# Altium PCB PCB1.PcbDoc
Units mm, origin at the board's own origin, x right, y up, seen from the top; angles counter-clockwise.
Board outline 152.4 x 101.6 mm, 4 copper layers (Top Layer, GND, VCC, Bottom Layer), stack 1.656 mm thick; 37 components, 51 nets, 234 pads, 63 vias.
Unrouted connection lines stored in the file: 10.
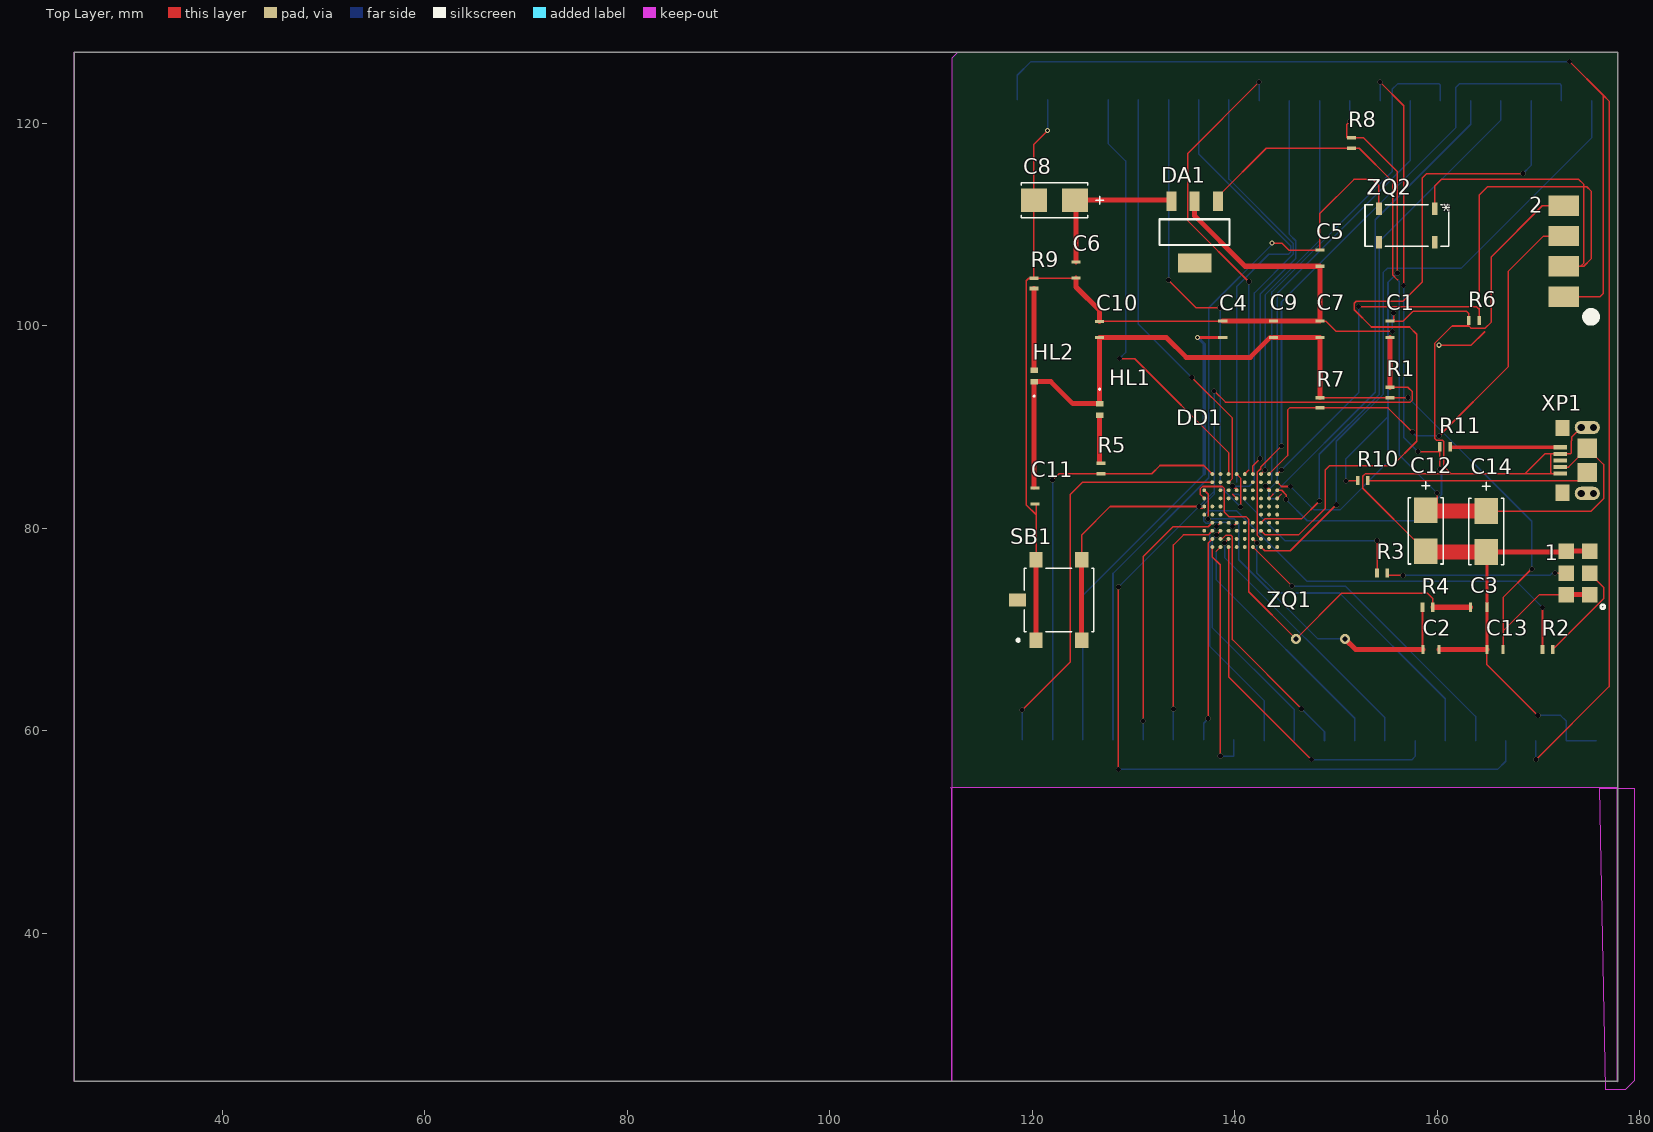
[diagram p0: Top Layer view]
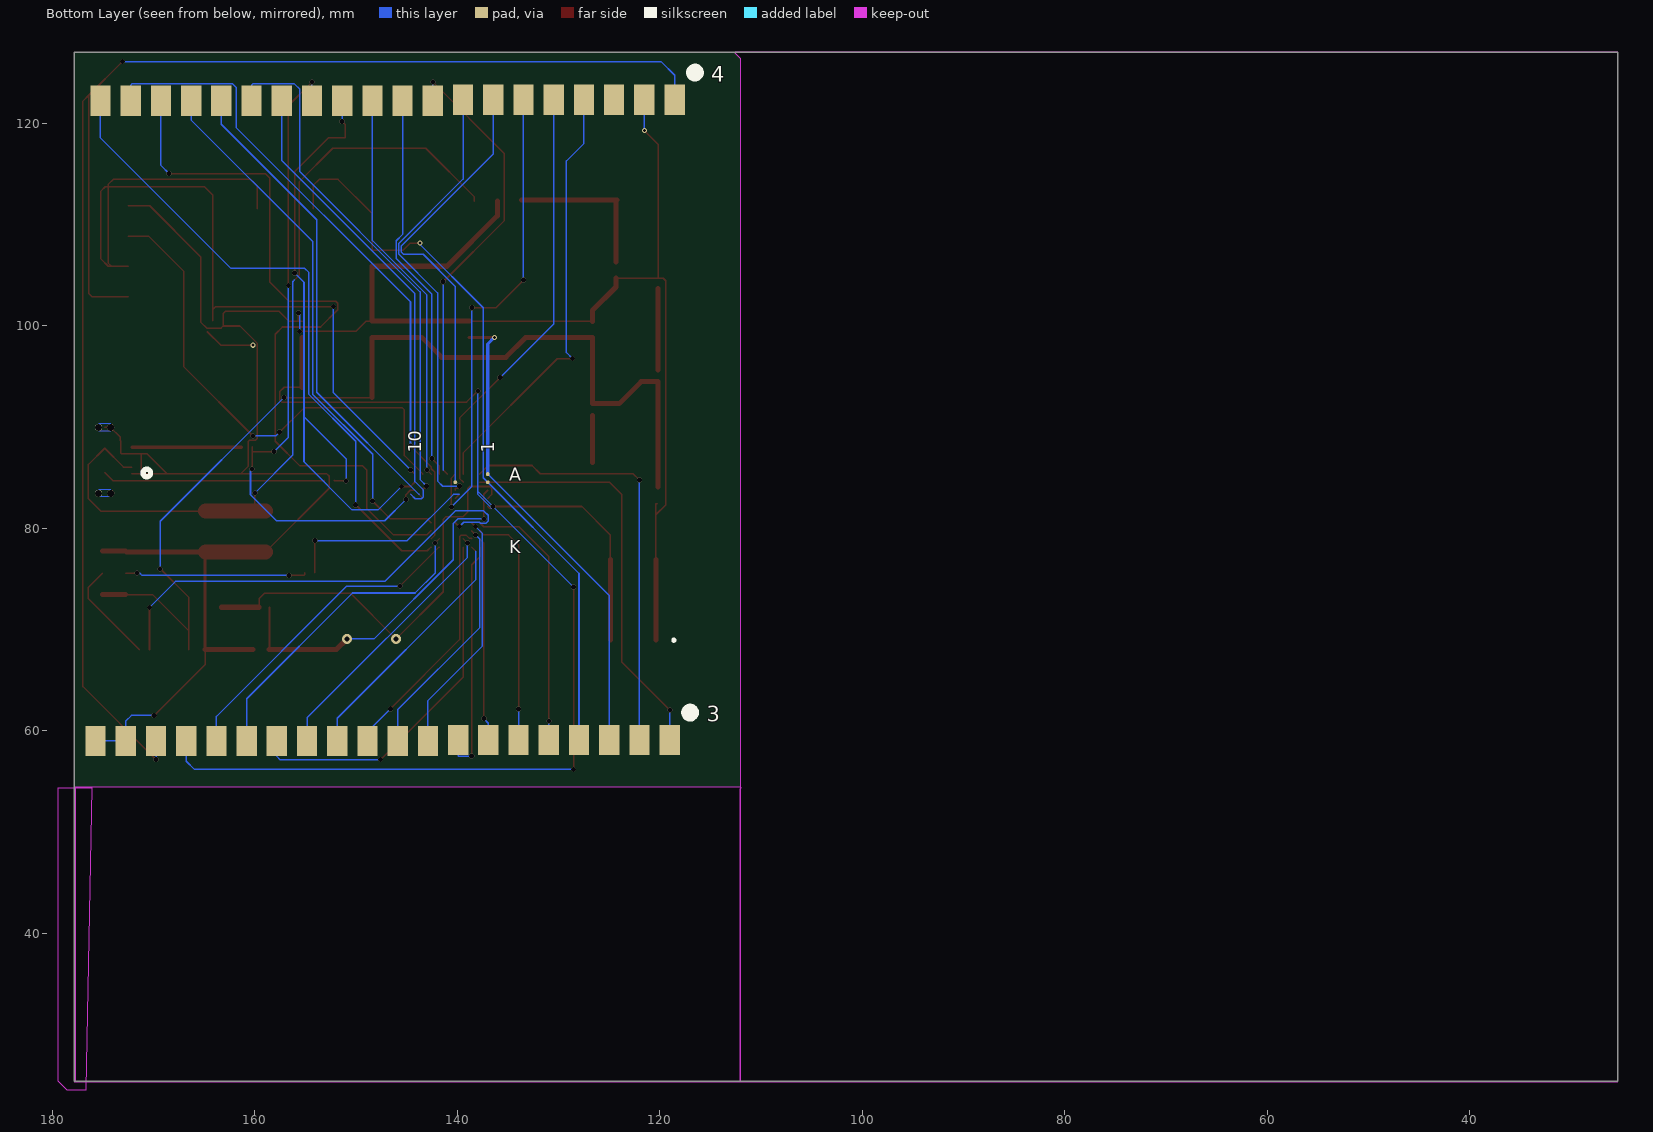
[diagram p1: Bottom Layer view, seen from below]
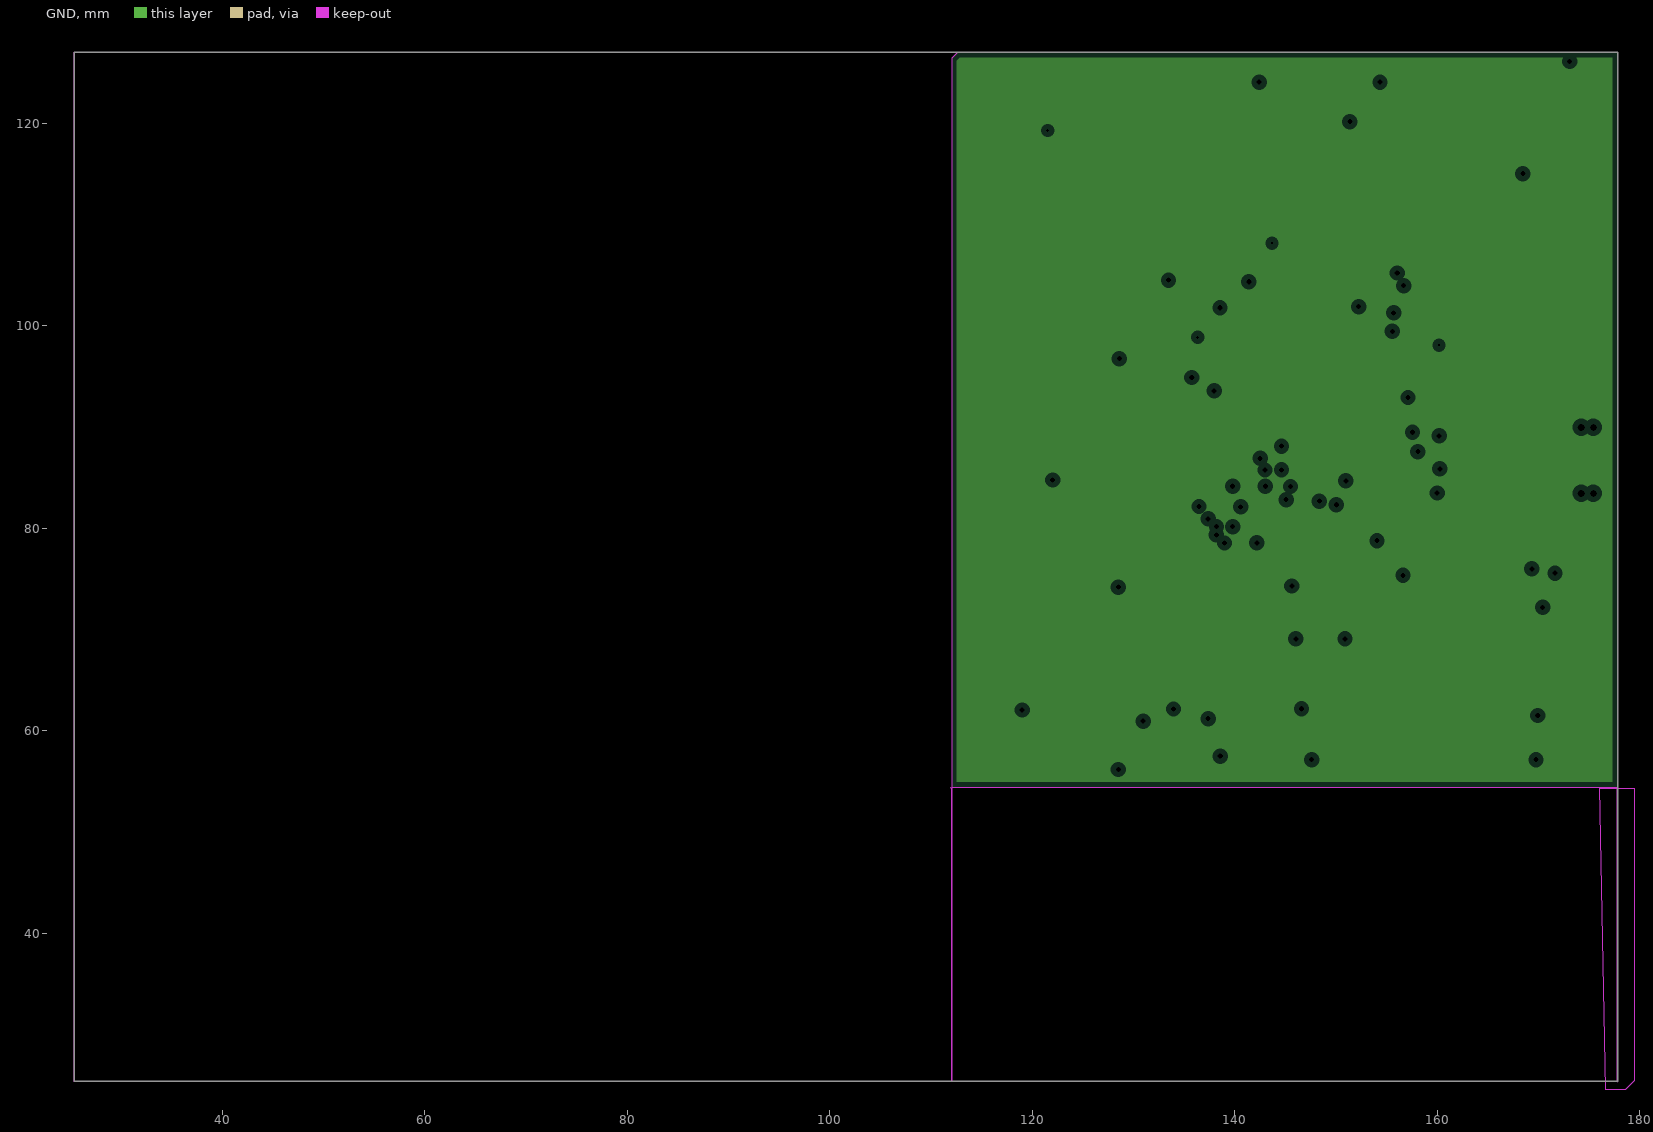
[diagram p2: GND, clearances drawn from the general rule]
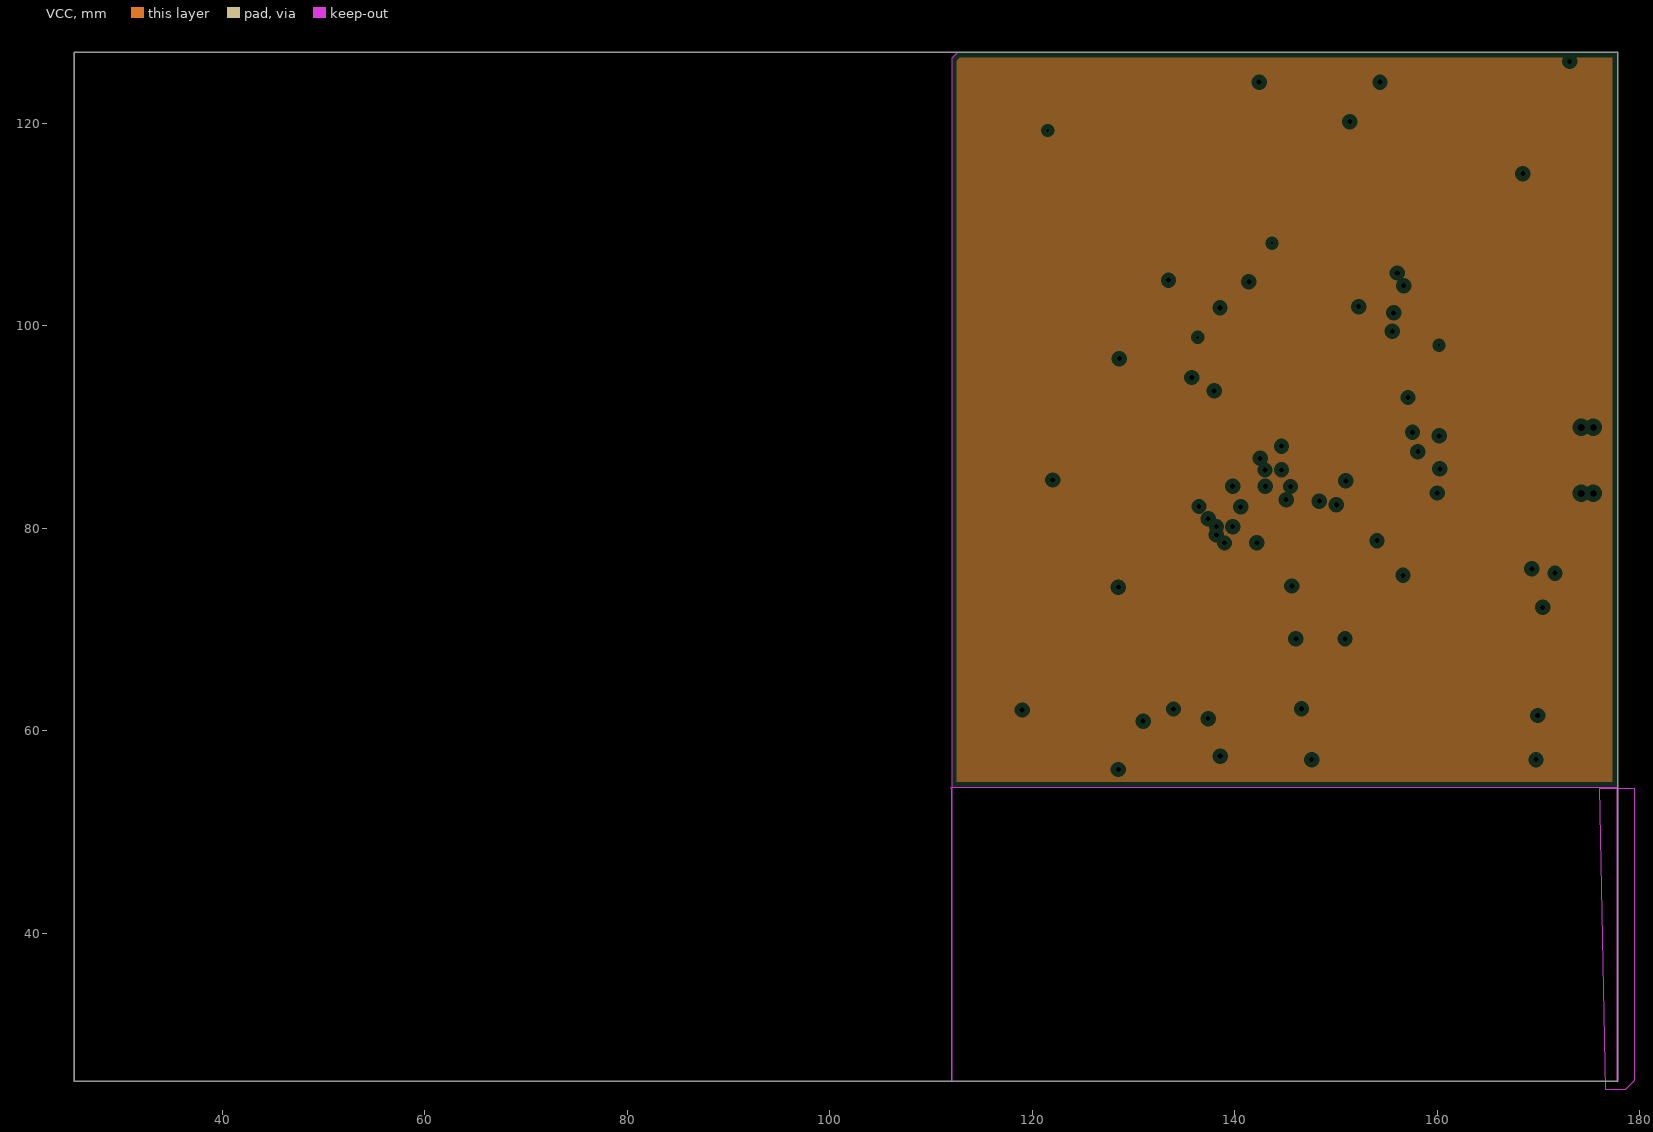
[diagram p3: VCC, clearances drawn from the general rule]

## Layer stack, top to bottom
Top Layer: signal copper 0.035
Dielectric 2: core 0.508, Core-036, Dk 4.2
GND: plane copper 0.035
Dielectric 1: dielectric 0.5, FR-4, Dk 4.2
VCC: plane copper 0.035
Dielectric 3: core 0.508, Core-036, Dk 4.2
Bottom Layer: signal copper 0.035

## Board outline
25.4,25.4 177.8,25.4 177.8,127 25.4,127
cut-out: 176.025,54.425 176.1,54.35 179.425,54.35 179.425,25.45 178.55,24.575 176.625,24.575
cut-out: 112.075,54.45 177.725,54.45 177.725,25.425 177.8,25.35 112.025,25.35 112.025,54.275 111.925,54.375
cut-out: 112.575,126.95 112.025,126.4 112.025,25.35 25.425,25.35 25.4,25.325 25.375,25.35 25.375,127.025 112.525,127.025 112.55,127

## Design rules (kind name [scope] priority, off if disabled: settings)
Clearance [All] p1: gap=0.1 ignorepadtopadclearanceinfootprint=TRUE
HoleSize [All] p1: absolutevalues=TRUE maxlimit=2 minlimit=0.5 maxpercent=80.000 minpercent=20.000
PlaneClearance [All] p1: clearance=0.508
PlaneConnect [All] p1: planeconnectstyle=Relief reliefexpansion=0.508 reliefentries=4 reliefconductorwidth=0.254 reliefairgap=0.254
PolygonConnect [All] p1: connectstyle=Relief reliefconductorwidth=0.254 reliefentries=4 polygonreliefangle="90 Angle" airgapwidth=0.254
RoomDefinition Sheet1 [InComponentClass('Sheet1')] p1: confinementstyle=ConfineIn formatcopy=TRUE lockcomponents=FALSE outline 178.85,27.025 392.81,27.025 392.81,88.003 178.85,88.003
RoutingVias [All] p1: holewidth=0.5 width=0.5 viastyle="Through Hole" minholewidth=0.3 minwidth=0.3 maxholewidth=1 maxwidth=1
SMDNeckDown [All] p1: percent=50.000
SolderMaskExpansion [All] p1: expansion=0.102 istentingtop=FALSE
Width [All] p1: maxlimit=2 minlimit=0.1 preferedwidth=0.15
27 further rules are at their usual default settings.

## Components (designator, comment, footprint, x,y, rotation, side; value= is the part's Value field where it differs from the comment)
1 "pin_boot" PIN_BOOT 175.025,73.45 r180 top
2 "pins_jtag" PIN_JTAG 172.466,102.874 r90 top
3 "pin_left" pin_left 118.998,59.1 r0 bottom
4 "pin_right" pin_right 118.514,122.299 r0 bottom
C1 "='0603'+' '+'63 В'+' '+'1 мкФ'+' '+'10%'+' '+'*'+'" C_0603 155.3,100.45 r270 top value="1 мкФ"
C2 "='0603'+' '+'63 В'+' '+'20 пФ'+' '+'10%'+' '+'*'+'" C_0603 160.175,68.025 r180 top value="20 пФ"
C3 "='0603'+' '+'63 В'+' '+'20 пФ'+' '+'10%'+' '+'*'+'" C_0603 164.875,72.2 r180 top value="20 пФ"
C4 "='0603'+' '+'63 В'+' '+'20 пФ'+' '+'10%'+' '+'*'+'" C_0603 138.8,98.85 r90 top value="20 пФ"
C5 "='0603'+' '+'63 В'+' '+'20 пФ'+' '+'10%'+' '+'*'+'" C_0603 148.4,107.475 r270 top value="20 пФ"
C6 "='0603'+' '+'63 В'+' '+'100 нФ'+' '+'10%'+' '+'*'+'" C_0603 124.32,106.295 r270 top value="100 нФ"
C7 "='0603'+' '+'63 В'+' '+'100 нФ'+' '+'10%'+' '+'*'+'" C_0603 148.4,100.45 r270 top value="100 нФ"
C8 "='CASE-C_6032'+' '+'63 В'+' '+'330 мкФ'+' '+'10%'+' '+'*'+'" CAPMP6.3X3.2_2.8N_KEM 122.175,112.4 r180 top value="330 мкФ"
C9 "='0603'+' '+'63 В'+' '+'100 нФ'+' '+'10%'+' '+'*'+'" C_0603 143.8,100.45 r270 top value="100 нФ"
C10 "='0603'+' '+'63 В'+' '+'100 нФ'+' '+'10%'+' '+'*'+'" C_0603 126.65,100.425 r270 top value="100 нФ"
C11 "='0603'+' '+'63 В'+' '+'100 нФ'+' '+'10%'+' '+'*'+'" C_0603 120.25,82.4 r90 top value="100 нФ"
C12 "='CASE-C_6032'+' '+'63 В'+' '+'100 мкФ'+' '+'10%'+' '+'*'+'" CAPMP6.3X3.2_2.8N_KEM 158.85,79.75 r270 top value="100 мкФ"
C13 "='0603'+' '+'63 В'+' '+'100 нФ'+' '+'10%'+' '+'*'+'" C_0603 164.875,68.025 r0 top value="100 нФ"
C14 "='CASE-C_6032'+' '+'63 В'+' '+'100 мкФ'+' '+'10%'+' '+'*'+'" CAPMP6.3X3.2_2.8N_KEM 164.825,79.675 r270 top value="100 мкФ"
DA1 "TC2117-3.3VDBTR Microchip" TC2117 138.325,112.3 r270 top
DD1 "STM32F103VBH7 STMicroelectronics" LFBGA100 140.575,81.75 r0 top
HL1 "XL-0603QYGC KENTO" LED_DIALIGHT_598_DIA-M 126.65,91.725 r270 top
HL2 "XL-0603QYGC KENTO" LED_DIALIGHT_598_DIA-M 120.175,95.05 r90 top
R1 "R-0603 0.1 Вт 10 кОм 10% Yageo" R_0603 155.3,93.925 r270 top value="10 кОм"
R2 "R-0603 0.1 Вт 100 кОм 10% Yageo" R_0603 171.391,68.025 r180 top value="100 кОм"
R3 "R-0603 0.1 Вт 100 кОм 10% Yageo" R_0603 154.034,75.6 r0 top value="100 кОм"
R4 "R-0603 0.1 Вт 1 МОм 10% Yageo" R_0603 159.541,72.2 r180 top value="1 МОм"
R5 "R-0603 0.1 Вт 510 Ом 10% Yageo" R_0603 126.775,85.384 r90 top value="510 Ом"
R6 "R-0603 0.1 Вт 10 кОм 10% Yageo" R_0603 163.109,100.5 r0 top value="10 кОм"
R7 "R-0603 0.1 Вт 10 кОм 10% Yageo" R_0603 148.4,91.884 r90 top value="10 кОм"
R8 "R-0603 0.1 Вт 1.5 кОм 10% Yageo" R_0603 151.525,117.525 r90 top value="1.5 кОм"
R9 "R-0603 0.1 Вт 510 Ом 10% Yageo" R_0603 120.175,104.691 r270 top value="510 Ом"
R10 "R-0603 0.1 Вт 20 Ом 10% Yageo" R_0603 152.125,84.725 r0 top value="20 Ом"
R11 "R-0603 0.1 Вт 20 Ом 10% Yageo" R_0603 160.234,88.05 r0 top value="20 Ом"
SB1 "B3S-1100 Omron" SW_B3S-1100_OMR 122.625,72.925 r90 top
XP1 "2174507-2 TE Connectivity" "CONN5_2013499-1_TEC - duplicate" 174.448,86.7 r90 top
ZQ1 "OSC_8M LCSC" HC-49S 150.875,69.075 r180 top
ZQ2 "OSC_32.7K LCSC" SOJ_MC-306_EPS 156.975,109.9 r270 top

## Footprints (in the part's own frame and the unit in brackets; to place one, negate y for a bottom-side part, rotate by r counter-clockwise, add the part's x,y. Pads: shape width x height; smd on the part's side, far side on the other; paste and mask are expansions set on the pad)
C_0603 [mm]
  rect 0.3x0.9 smd: 1(0,0) 2(1.6,0)
  body extent -0.3,-0.6 1.9,0.6, height 0.9
CAPMP6.3X3.2_2.8N_KEM [mm]
  rect 2.55x2.3 smd paste+0 mask+0: 1(-2.025,0) 2(2.025,0)
  silkscreen extent -4.85,-1.73 3.28,1.73, body extent -3.15,-1.72 3.15,1.78, height 2.81
"CONN5_2013499-1_TEC - duplicate" [mil]
  rect 16x53 smd paste+0 mask+0: 1(-51.18,91.54) 2(-25.59,91.54) 3(0,91.54) 4(25.59,91.54) 5(51.18,91.54)
  rect 75x75 smd: 6(-47.24,-13.86) 7(47.24,-13.86)
  rect 63x55 smd: 8(-125.98,82.6) 9(125.98,82.6)
  oval 52x98 smd: 10(-128.15,-13.86) 11(128.15,-13.86)
  round 28 hole 28 unplated: 12(-128.15,9.64) 13(-128.15,-37.36) 14(128.15,9.64) 15(128.15,-37.36)
  Multi-Layer lines w1: -142.15,9.64 -142.15,-37.36 ; -114.15,9.64 -114.15,-37.36 ; 114.15,9.64 114.15,-13.86 114.15,-37.36 ; 142.15,9.64 142.15,-13.86 142.15,-37.36
  body extent -154,-98 154,98, height 107
HC-49S [mm]
  round 1 hole 0.5: 1(0,0) 2(4.85,0)
  body extent -3.05,-2.3 7.95,2.35, height 13.46
LED_DIALIGHT_598_DIA-M [mm]
  rect 0.544x0.761 smd paste+0 mask+0: 1(-0.578,0) 2(0.578,0)
  silkscreen extent -2.08,-0.08 -1.93,0.08, body extent -0.8,-0.39 0.8,0.39, height 0.71
LFBGA100 [mm]
  round 0.38 smd far side paste+0 mask+0: A1(-3.6,3.6) B1(-3.6,2.8) B5(-0.4,2.8)
  round 0.38 smd paste+0 mask+0: A2(-2.8,3.6) A3(-2,3.6) A4(-1.2,3.6) A5(-0.4,3.6) A6(0.4,3.6) A7(1.2,3.6) A8(2,3.6) A9(2.8,3.6) A10(3.6,3.6) B2(-2.8,2.8) B3(-2,2.8) B4(-1.2,2.8) B6(0.4,2.8) B7(1.2,2.8) B8(2,2.8) B9(2.8,2.8) B10(3.6,2.8) C1(-3.6,2) C3(-2,2) C4(-1.2,2) C5(-0.4,2) C6(0.4,2) C7(1.2,2) C8(2,2) C9(2.8,2) C10(3.6,2) D1(-3.6,1.2) D3(-2,1.2) D4(-1.2,1.2) D5(-0.4,1.2) D6(0.4,1.2) D7(1.2,1.2) D8(2,1.2) D9(2.8,1.2) D10(3.6,1.2) E1(-3.6,0.4) E2(-2.8,0.4) E3(-2,0.4) E8(2,0.4) E9(2.8,0.4) E10(3.6,0.4) F1(-3.6,-0.4) F2(-2.8,-0.4) F3(-2,-0.4) F8(2,-0.4) F9(2.8,-0.4) F10(3.6,-0.4) G2(-2.8,-1.2) G3(-2,-1.2) G4(-1.2,-1.2) G5(-0.4,-1.2) G6(0.4,-1.2) G7(1.2,-1.2) G8(2,-1.2) G9(2.8,-1.2) G10(3.6,-1.2) H1(-3.6,-2) H2(-2.8,-2) H3(-2,-2) H4(-1.2,-2) H5(-0.4,-2) H6(0.4,-2) H7(1.2,-2) H8(2,-2) H9(2.8,-2) H10(3.6,-2) J1(-3.6,-2.8) J2(-2.8,-2.8) J3(-2,-2.8) J4(-1.2,-2.8) J5(-0.4,-2.8) J6(0.4,-2.8) J7(1.2,-2.8) J8(2,-2.8) J9(2.8,-2.8) J10(3.6,-2.8) K2(-2.8,-3.6) K3(-2,-3.6) K4(-1.2,-3.6) K5(-0.4,-3.6) K6(0.4,-3.6) K7(1.2,-3.6) K8(2,-3.6) K9(2.8,-3.6) K10(3.6,-3.6)
  round 0.38 on Plane1 paste+0 mask+0: C2(-2.8,2) E4(-1.2,0.4) E5(-0.4,0.4) E6(0.4,0.4) E7(1.2,0.4) G1(-3.6,-1.2)
  round 0.38 on Plane2 paste+0 mask+0: D2(-2.8,1.2) F4(-1.2,-0.4) F5(-0.4,-0.4) F6(0.4,-0.4) F7(1.2,-0.4) K1(-3.6,-3.6)
  body extent -5.08,-5.08 5.08,5.08, height 1.7
PIN_BOOT [mil]
  rect 60x60 smd: 1(0,0) 2(90.55,0) 3(0,-82.68) 4(90.55,-82.68) 5(0,-169.29) 6(90.55,-169.29)
  silkscreen extent -59,39 -43,55
PIN_JTAG [mm]
  rect 2x3 smd: 1(0,0) 2(3,0) 3(5.983,0) 4(8.967,0)
  silkscreen extent -2.42,-3.12 -1.58,-2.28
pin_left [mm]
  rect 2x3 smd: 1(0,0) 2(3,0) 3(5.983,0) 4(8.967,0) 5(11.95,0) 6(14.933,0) 7(17.917,0) 8(20.9,0) 9(23.883,0.1) 10(26.867,0.1) 11(29.85,0.1) 12(32.833,0.1) 13(35.817,0.1) 14(38.8,0.1) 15(41.783,0.1) 16(44.767,0.1) 17(47.75,0.1) 18(50.733,0.1) 19(53.717,0.1) 20(56.7,0.1)
  silkscreen extent -2.42,-3.12 -1.58,-2.28
pin_right [mm]
  rect 2x3 smd: 1(0,0) 2(3,0) 3(5.983,0) 4(8.967,0) 5(11.95,0) 6(14.933,0) 7(17.917,0) 8(20.9,0) 9(23.883,0.1) 10(26.867,0.1) 11(29.85,0.1) 12(32.833,0.1) 13(35.817,0.1) 14(38.8,0.1) 15(41.783,0.1) 16(44.767,0.1) 17(47.75,0.1) 18(50.733,0.1) 19(53.717,0.1) 20(56.7,0.1)
  silkscreen extent -2.42,-3.12 -1.58,-2.28
R_0603 [mm]
  rect 0.35x0.9 smd: 1(0,0) 2(1.016,0)
  body extent -0.3,-0.58 1.33,0.58, height 0.3
SOJ_MC-306_EPS [mm]
  rect 1.239x0.558 smd paste+0 mask+0: 1(-1.636,2.75) 2(-1.636,-2.75) 3(1.635,-2.75) 4(1.635,2.75)
  silkscreen extent -2.03,-4.13 2.03,4.13, body extent -1.91,-4 1.91,4, height 1.7
SW_B3S-1100_OMR [mm]
  rect 1.55x1.3 smd paste+0 mask+0: 1(-3.975,2.25) 2(3.975,2.25) 3(-3.975,-2.25) 4(3.975,-2.25)
  rect 1.3x1.7 smd: 5(0,4.1)
  silkscreen extent -4.1,-3.43 3.13,4.15, body extent -3.5,-3.25 3.5,3.25, height 3.15
TC2117 [mm]
  rect 1.9x1 smd: 1(0,0) 2(0,-2.3) 3(0,-4.6)
  rect 1.9x3.3 smd: 4(6.1,-2.3)
  silkscreen extent 1.79,-5.75 4.32,1.15, body extent -0.48,-5.68 6.82,1.02, height 1.8

## Part data
1 2 3 4: "pads"
C1: library part "C 1 мкФ", Package=0603, Tolerance=10%, Voltage="63 В"
C2 C3 C4 C5: library part "C 20 пФ", Package=0603, Tolerance=10%, Voltage="63 В"
C6 C7 C9 C10 C11 C13: library part "C 100 нФ", Package=0603, Tolerance=10%, Voltage="63 В"
C8: library part "C 330 мкФ", Package=CASE-C_6032, Tolerance=10%, Voltage="63 В"
C12 C14: library part "C 100 мкФ", Package=CASE-C_6032, Tolerance=10%, Voltage="63 В"
DA1: library part TC2117-3.3VDBTR, Manufacturer=Microchip, Name=TC2117-3.3VDBTR
DD1: library part STM32F103VBH7, Manufacturer=STMicroelectronics, Name=STM32F103VBH7
HL1 HL2: library part LED-0603, Manufacturer=KENTO, Name=XL-0603QYGC
R1 R6 R7: library part "R 10 кОм", Manufacturer=Yageo, Package=R-0603, Power="0.1 Вт", Tolerance=10%
R2 R3: library part "R 100 кОм", Manufacturer=Yageo, Package=R-0603, Power="0.1 Вт", Tolerance=10%
R4: library part "R 1 МОм", Manufacturer=Yageo, Package=R-0603, Power="0.1 Вт", Tolerance=10%
R5 R9: library part "R 510 Ом", Manufacturer=Yageo, Package=R-0603, Power="0.1 Вт", Tolerance=10%
R8: library part "R 1.5 кОм", Manufacturer=Yageo, Package=R-0603, Power="0.1 Вт", Tolerance=10%
R10 R11: library part "R 20 Ом", Manufacturer=Yageo, Package=R-0603, Power="0.1 Вт", Tolerance=10%
SB1: library part B3S-1100, Manufacturer=Omron, Name=B3S-1100
XP1: library part 2174507-2, "usb", Manufacturer="TE Connectivity", Name=2174507-2
ZQ1: library part OSC_8M, Manufacturer=LCSC, Name=OSC_8M
ZQ2: library part OSC_32.7K, Manufacturer=LCSC, Name=OSC_32.7K

## Via types
v1: diameter 0.5, hole 0.5, Top Layer to Bottom Layer, 59 vias
v2: diameter 0.5, hole 0.3, Top Layer to Bottom Layer, 4 vias

## Nets (pads, with @x,y where several pads share a name; then routed paths per layer and width w, separated by ;. In a path a pad name is that pad's centre, name@x,y a point inside that pad or via, vN(x,y) a via of type N, cw(c..) or ccw(c..) an arc to the next point about the centre after c; other vN are vias at no path point)
+5V: C12.1 C14.1 DA1.1 R8.1 XP1.2 XP1.7 | length 83.3
  Top Layer w0.15: DA1.1 138.325,112.75 143.1,117.525 R8.1 152.274,117.525 155.6,114.198 155.6,104.978 156.058,104.521 ; C12.1@158.925,81.7 C12.1 159.41,81.775 159.969,82.334 v1(159.969,83.49) ; C14.1 175.197,81.7 176.403,82.906 176.403,86.297 XP1.7 172.95,86.05 XP1.2
  Top Layer w1.5: C12.1@158.925,81.7 C14.1
  Bottom Layer w0.15: 156.058,104.521 156.235,104.343 156.235,87.224 v1(159.969,83.49)
GND: 1.5 1.6 2.4 3.19 3.20 4.2 C1.1 C2.1 C3.1 C4.2 C5.2 C6.2 C7.1 C8.2 C9.1 C10.1 C11.1 C12.2 C13.1 C14.2 DA1.2 R6.1 R9.1 SB1.1 SB1.2 XP1.1 XP1.4 XP1.11 | length 266.2
  Top Layer w0.15: C11.1 120.375,82.4 120.375,81.326 ; SB1.2 120.375,81.326 ; 121.514,119.275 120.15,117.911 C8.2 R9.1@120.15,104.691 ; C6.2 124.316,104.691 R9.1 R9.1@120.15,104.691 ; C10.1 126.675,100.45 C4.2 ; C7.1 149.003,100.45 150.012,99.441 v1(155.55,99.441) ; C1.1 C1.1@155.677,100.45 ; v1(155.677,101.27) C1.1@155.677,100.45 ; C12.2@158.925,77.65 C12.2 C12.2@158.825,77.75 ; C14.2 C14.2@164.875,77.6 ; C13.1 164.875,66.548 v1(169.904,61.519) ; XP1.1 171.298,85.4 ; 2.4 170.358,111.84 165.329,106.811 165.329,100.381 164.719,99.771 163.312,99.771 163.109,99.974 ; 1.6@172.625,77.65 1.6 C12.2@158.825,77.75 ; XP1.11 174.216,89.955 173.25,88.989 173.25,88.65 173.225,88.625 173.225,87.438 173.137,87.35 XP1.4 171.298,87.35 ; R9.1@120.15,104.691 119.652,104.691 119.405,104.445 119.405,82.296 120.375,81.326 ; C1.1@155.677,100.45 156.609,100.45 157.582,101.422 162.88,101.422 163.109,101.194 R6.1 163.109,99.974 ; C12.2@158.825,77.75 152.629,83.946 152.629,85.141 152.888,85.4 161.341,85.4 ; 161.341,85.4 168.675,85.4 ; 161.341,85.4 160.604,86.137 160.604,88.595 160.503,88.697 159.918,88.697 159.715,88.9 159.715,98.247 161.442,99.974 163.109,99.974 ; 168.675,85.4 171.298,85.4 ; 168.675,85.4 170.625,87.35 171.298,87.35 ; 171.298,85.4 171.175,85.523 171.175,87.227 171.298,87.35
  Top Layer w0.3: C13.1 C3.1 C14.2@164.875,77.6
  Top Layer w0.5: SB1.1 SB1.2 ; C6.2 124.321,103.83 126.65,101.5 C10.1 ; DA1.2 136.025,110.85 141,105.875 C5.2 C7.1 C9.1 C4.2 ; C2.1 C13.1 ; C14.2 1.6@172.625,77.65 ; 1.6 1.5
  Top Layer w1.5: C12.2@158.925,77.65 C14.2
  Bottom Layer w0.15: 121.514,119.275 4.2 ; v1(155.55,99.441) 155.55,101.143 v1(155.677,101.27) ; v1(169.904,61.519) 172.156,61.519 172.714,60.96 3.19 3.20
Net1_1: 1.1 1.2 C7.2 C9.2 C10.2 C11.2 C13.2 HL1.1 HL2.1 R1.2 R7.2 | length 103.6
  Top Layer w0.15: C11.2@120.175,84.075 C11.2 ; C9.2@143.5,98.85 C9.2 ; R7.2 155.291,92.9 R1.2 v1(157.099,92.909) ; C13.2 166.475,69.85 ; v1(169.316,75.997) 166.475,73.155 166.475,69.85 ; 1.2 170.075,73.45 166.475,69.85
  Top Layer w0.5: C11.2@120.175,84.075 HL2.1 121.825,94.472 123.994,92.303 HL1.1 C10.2 133.237,98.825 135.187,96.875 141.525,96.875 C9.2@143.5,98.85 ; C9.2 C7.2 R7.2 ; 1.2 1.1
  Bottom Layer w0.15: v1(157.099,92.909) 169.316,80.692 v1(169.316,75.997)
Net1_3: 1.3 R2.1 | length 10.2
  Top Layer w0.15: R2.1 176.4,73.034 176.4,74.175 1.3
Net1_4: 1.4 R3.2 | length 18
  Top Layer w0.15: R3.2 155.05,75.45 155.15,75.35 v1(156.6,75.35) ; v1(171.602,75.565) 171.617,75.55 1.4
  Bottom Layer w0.15: v1(156.6,75.35) 171.117,75.35 171.332,75.565 v1(171.602,75.565)
Net2_2: 2.2 DD1.A10 R6.2 ZQ2.1 | length 91.2
  Top Layer w0.15: DD1.A10 v1(144.601,85.776) ; v1(152.222,101.879) 163.846,101.879 164.125,101.6 ; ZQ2.1 159.725,113.792 160.408,114.475 173.939,114.475 174.425,113.989 174.425,113.725 ; R6.2 164.125,101.6 ; 2.2 174.142,105.874 ; 164.125,101.6 164.125,112.904 164.946,113.725 174.425,113.725 ; 174.142,105.874 174.449,105.874 175.175,106.6 175.175,113.302 174.752,113.725 174.425,113.725 ; 174.142,105.874 174.425,106.156 174.425,113.725
  Bottom Layer w0.15: v1(144.601,85.776) 152.222,93.397 v1(152.222,101.879)
Net2_3: 2.3 DD1.A9 R7.1 | length 49.3
  Top Layer w0.15: DD1.A9 145.208,87.183 145.208,91.69 145.402,91.884 R7.1 155.131,91.884 v1(157.531,89.484) ; v1(160.172,89.129) 166.98,95.936 166.98,105.359 170.477,108.857 2.3
  Bottom Layer w0.15: v1(157.531,89.484) 157.886,89.129 v1(160.172,89.129)
NetC2_2: C2.2 DD1.C1 R4.2 ZQ1.1 | length 35.8
  Top Layer w0.15: DD1.C1 137.363,83.362 v1(137.363,80.924) ; R4.2 158.525,68.075 C2.2
  Top Layer w0.5: ZQ1.1 151.925,68.025 C2.2
  Bottom Layer w0.15: v1(137.363,80.924) 139.929,80.924 140.386,80.467 140.386,76.886 148.197,69.075 ZQ1.1
NetC3_2: C3.2 DD1.D1 R4.1 ZQ1.2 | length 42.6
  Top Layer w0.15: DD1.D1 136.601,83.324 136.601,83.922 136.804,84.125 138.76,84.125 138.963,83.922 138.963,81.585 139.395,81.153 141.097,81.153 141.376,80.874 141.376,73.724 ZQ1.2 150.525,73.575 159.025,73.575 159.541,73.059 R4.1
  Top Layer w0.5: R4.1 C3.2
NetC6_1: C6.1 C8.1 DA1.3 | length 15.7
  Top Layer w0.15: C8.1 C8.1@124.321,112.279 ; DA1.3@133.625,112.4 DA1.3
  Top Layer w0.5: C8.1 DA1.3@133.625,112.4 ; C6.1 C8.1@124.321,112.279
NetDD1_D5: DD1.D5 R3.1 | length 19.9
  Top Layer w0.15: 139.788,83.337 DD1.D5 ; R3.1 v1(154.034,78.782)
  Bottom Layer w0.15: 139.788,83.337 140.368,83.337 144.922,78.782 v1(154.034,78.782)
NetDD1_G5: DD1.G5 R2.2 | length 46
  Top Layer w0.15: v1(139.782,80.157) DD1.G5 ; R2.2 170.375,72.179 v1(170.383,72.187)
  Bottom Layer w0.15: v1(139.782,80.157) 139.351,80.587 137.795,80.587 137.7,80.493 137.16,80.493 136.931,80.721 136.931,81.28 137.363,81.712 140.183,81.712 147.142,74.752 167.818,74.752 v1(170.383,72.187)
NetHL1_2: HL1.2 R5.2 | length 4.8
  Top Layer w0.15: R5.2@126.65,86.5 126.75,86.4 R5.2
  Top Layer w0.5: R5.2@126.65,86.5 HL1.2
NetHL2_2: HL2.2 R9.2 | length 8
  Top Layer w0.5: HL2.2 R9.2
NetR10_2: R10.2 XP1.6 | length 22
  Top Layer w0.15: R10.2 153.141,84.709 174.009,84.709 XP1.6
NetR11_2: R11.2 XP1.5 | length 10.9
  Top Layer w0.15: R11.2 R11.2@161.3,88
  Top Layer w0.3: R11.2@161.3,88 XP1.5
PA0: 3.5 DD1.G2 | length 26.3
  Top Layer w0.15: v1(130.948,60.96) 130.948,77.201 133.896,80.15 137.375,80.15 DD1.G2
  Bottom Layer w0.15: 3.5 v1(130.948,60.96)
PA1: 3.6 DD1.H2 | length 23.7
  Top Layer w0.15: v1(133.931,62.154) 133.931,78.356 134.925,79.35 137.375,79.35 DD1.H2
  Bottom Layer w0.15: 3.6 v1(133.931,62.154)
PA2: 3.7 DD1.J2 | length 20.2
  Top Layer w0.15: v1(137.363,61.206) 137.363,78.538 DD1.J2
  Bottom Layer w0.15: 3.7 136.914,60.757 v1(137.363,61.206)
PA3: 3.8 DD1.K2 | length 23.9
  Top Layer w0.15: DD1.K2 137.775,77.176 138.557,76.394 v1(138.557,57.506)
  Bottom Layer w0.15: v1(138.557,57.506) 139.898,57.506 3.8
PA4: 3.9 DD1.G3 | length 24.2
  Top Layer w0.15: v1(138.187,80.162) DD1.G3
  Bottom Layer w0.15: v1(138.187,80.162) 137.501,79.476 137.501,68.366 142.881,62.986 3.9
PA5: 3.10 DD1.H3 | length 24.5
  Top Layer w0.15: v1(138.176,79.351) DD1.H3
  Bottom Layer w0.15: v1(138.176,79.351) 137.751,78.926 137.751,70.216 145.864,62.103 3.10
PA6: 3.11 DD1.J3 | length 25.4
  Top Layer w0.15: DD1.J3 138.575,78.994 138.786,78.994 139.116,79.324 139.598,79.324 139.751,79.172 139.751,69.015 v1(146.583,62.183)
  Bottom Layer w0.15: v1(146.583,62.183) 148.848,59.919 3.11
PA7: 3.12 DD1.K3 | length 25
  Top Layer w0.15: 138.176,77.751 DD1.K3
  Bottom Layer w0.15: 138.176,77.751 138.176,74.894 151.831,61.239 3.12
PA8: 4.16 DD1.D9 | length 47.5
  Top Layer w0.15: DD1.D9 143.762,83.337
  Bottom Layer w0.15: 143.762,83.337 153.857,93.432 153.857,110.465 163.281,119.888 4.16
PA9: 4.15 DD1.C9 | length 51.6
  Top Layer w0.15: v1(143.002,84.15) 143.205,83.947 143.375,83.947 DD1.C9
  Bottom Layer w0.15: v1(143.002,84.15) 143.662,84.811 143.662,103.334 155.524,115.196 155.524,123.342 156.058,123.876 160.17,123.876 160.297,123.749 4.15
PA10: 4.14 DD1.D10 | length 46.9
  Top Layer w0.15: DD1.D10 144.562,83.337
  Bottom Layer w0.15: 144.562,83.337 144.131,82.906 143.535,82.906 143.332,83.109 143.332,83.769 144.17,84.607 144.17,103.163 157.314,116.307 4.14
PA11: 4.13 DD1.C10 R11.1 | length 65.7
  Top Layer w0.15: DD1.C10 144.621,83.75 145.059,83.312 v1(145.059,82.829) ; v1(154.331,124.053) 156.667,121.717 v1(156.667,103.962) ; v1(158.073,87.565) 160.234,87.565 ; v1(160.234,85.867) 160.234,87.565 ; R11.1 160.234,87.565
  Bottom Layer w0.15: v1(145.059,82.829) 147.142,80.747 157.836,80.747 160.401,83.312 160.401,85.7 v1(160.234,85.867) ; 4.13 v1(154.331,124.053) ; v1(156.667,103.962) 156.667,88.971 v1(158.073,87.565)
PA12: 4.12 DD1.B10 R8.2 R10.1 | length 62.5
  Top Layer w0.15: DD1.B10 144.6,84.125 v1(145.491,84.125) ; v1(150.952,84.684) 152.125,84.684 R10.1 ; v1(151.347,120.156) 151.029,119.838 151.029,118.541 R8.2 152.73,118.541 156.032,115.239 v1(156.032,105.207)
  Bottom Layer w0.15: v1(145.491,84.125) 147.803,81.813 150.368,81.813 155.118,86.563 155.118,91.008 ; v1(150.952,84.684) 150.952,86.843 155.118,91.008 ; v1(151.347,120.156) 4.12 ; v1(156.032,105.207) 155.118,104.292 155.118,91.008
PA15: 4.11 DD1.A8 | length 39.2
  Top Layer w0.15: DD1.A8 v1(142.977,85.75)
  Bottom Layer w0.15: v1(142.977,85.75) 142.977,103.026 148.364,108.414 4.11
PB0: 3.13 DD1.J4 | length 26.7
  Top Layer w0.15: v1(138.975,78.55) DD1.J4
  Bottom Layer w0.15: v1(138.975,78.55) 138.975,77.128 154.814,61.289 3.13
PB1: 3.14 DD1.K4 | length 36.3
  Top Layer w0.15: DD1.K4 139.375,65.349 v1(147.574,57.15)
  Bottom Layer w0.15: v1(147.574,57.15) 157.48,57.15 157.798,57.468 3.14
PB3: 4.10 DD1.A7 | length 38.9
  Top Layer w0.15: DD1.A7 141.775,86.181 v1(142.494,86.9)
  Bottom Layer w0.15: v1(142.494,86.9) 142.494,103.146 146,106.652 146,108.4 145.381,109.02 4.10
PB4: 4.9 DD1.A6 | length 46.2
  Top Layer w0.15: DD1.A6 141.375,85.75 ; v1(141.376,104.343) 135.331,110.388 135.331,116.992 v1(142.392,124.054)
  Bottom Layer w0.15: 141.375,85.75 141.376,85.751 v1(141.376,104.343) ; v1(142.392,124.054) 142.397,124.049 4.9
PB5: 4.8 DD1.C5 | length 44.9
  Top Layer w0.15: v1(139.776,84.15) 139.979,83.947 140.175,83.947 DD1.C5
  Bottom Layer w0.15: 4.8 139.414,114.486 145.75,108.15 145.75,107.059 141.935,103.244 141.935,84.658 141.427,84.15 v1(139.776,84.15)
PB6: 4.7 DD1.B5 | length 44.8
  Bottom Layer w0.15: 4.7 136.431,116.969 145.5,107.9 145.5,107.262 145.288,107.05 143.347,107.05 140.175,103.878 DD1.B5
PB7: 4.6 DD1.A5 | length 47.9
  Top Layer w0.15: v1(133.447,104.5) 136.169,101.778 v1(138.532,101.778) ; DD1.A5 140.564,84.961 v1(140.564,82.118)
  Bottom Layer w0.15: v1(133.447,104.5) 4.6 ; v1(138.532,101.778) 138.532,84.15 v1(140.564,82.118)
PB8: 4.5 DD1.B4 | length 41.8
  Top Layer w0.15: v1(135.738,94.894) 139.751,90.881 139.751,84.926 DD1.B4
  Bottom Layer w0.15: 4.5 130.464,100.168 v1(135.738,94.894)
PB9: 4.4 DD1.A4 | length 43.3
  Top Layer w0.15: 128.588,96.744 130.106,96.744 139.375,87.475 DD1.A4
  Bottom Layer w0.15: 4.4 127.481,117.994 129.2,116.275 129.2,97.357 128.588,96.744
PB10: 3.15 DD1.J7 | length 31.5
  Top Layer w0.15: DD1.J7 v1(142.164,78.561)
  Bottom Layer w0.15: v1(142.164,78.561) 142.164,75.59 144.145,73.609 150.343,73.609 160.781,63.171 3.15
PB11: 3.16 DD1.K7 | length 31.3
  Top Layer w0.15: DD1.K7 v1(145.63,74.295)
  Bottom Layer w0.15: v1(145.63,74.295) 150.887,74.295 163.764,61.417 3.16
PB12: 4.20 DD1.K8 | length 64.1
  Top Layer w0.15: DD1.K8 142.95,77.775 145.466,77.775 v1(150.012,82.321)
  Bottom Layer w0.15: v1(150.012,82.321) 150.012,88.595 154.635,93.218 154.635,105.258 155.042,105.664 162.331,105.664 175.214,118.547 4.20
PB13: 4.19 DD1.J8 | length 65
  Top Layer w0.15: DD1.J8 142.189,79.336 142.189,85.522 142.545,85.877 142.545,86.055 v1(144.602,88.113)
  Bottom Layer w0.15: v1(144.602,88.113) 144.602,102.362 161.823,119.583 161.823,123.546 162.154,123.876 172.11,123.876 172.231,123.756 4.19
PB14: 4.18 DD1.H8 | length 75.4
  Top Layer w0.15: DD1.H8 142.95,79.375 146.329,79.375 148.92,81.966 148.92,85.75 149.327,86.157 155.524,86.157 157.963,88.595 157.963,99.162 157.249,99.875 153.49,99.875 151.79,101.575 151.79,102.21 151.994,102.413 156.591,102.413 158.521,104.343 158.521,114.605 158.928,115.011 v1(168.427,115.011)
  Bottom Layer w0.15: v1(168.427,115.011) 169.247,115.831 4.18
PB15: 4.17 DD1.G8 | length 53.6
  Top Layer w0.15: DD1.G8 142.951,80.926 146.585,80.926 v1(148.336,82.677)
  Bottom Layer w0.15: v1(148.336,82.677) 148.336,87.3 154.254,93.218 154.254,108.31 166.264,120.32 4.17
PC13: 3.2 DD1.A2 R5.1 | length 42.4
  Top Layer w0.15: v1(121.998,84.761) 122.62,85.384 R5.1 131.784,85.384 132.6,86.2 136.925,86.2 DD1.A2
  Bottom Layer w0.15: 3.2 v1(121.998,84.761)
PC14: 3.3 C4.1 DD1.A1 | length 45
  Bottom Layer w0.15: 3.3 124.981,73.356 DD1.A1
  Bottom Layer w0.3: 136.325,98.85 136.975,98.2 DD1.A1
PC15: 3.4 C5.1 DD1.B1 ZQ2.2 | length 74
  Top Layer w0.15: 143.663,108.15 144.65,108.15 145.325,107.475 C5.1 148.4,111.1 151.75,114.45 153.619,114.45 154.225,113.844 ZQ2.2
  Bottom Layer w0.15: 3.4 127.964,75.539 DD1.B1 137.413,84.988 137.413,101.781 143.662,108.031 143.662,108.15
RESET: 3.17 C1.2 DD1.E1 R1.1 SB1.3 SB1.4 | length 136
  Top Layer w0.15: SB1.4 124.875,79.35 127.675,82.15 v1(136.455,82.15) ; v1(128.499,56.185) v1(128.499,74.193) ; v1@136.601,81.991 136.816,81.991 DD1.E1 ; v1(137.947,93.574) 139.065,92.456 157.328,92.456 157.531,92.659 157.531,93.472 157.078,93.925 R1.1
  Top Layer w0.5: SB1.3 SB1.4 ; R1.1 C1.2
  Bottom Layer w0.15: v1(128.499,56.185) 165.935,56.185 166.748,56.998 3.17 ; v1(128.499,74.193) v1(136.455,82.15) 137.947,83.642 ; v1@136.601,81.991 136.608,81.998 137.947,83.337 137.947,83.642 ; v1(137.947,93.574) 137.947,83.642
VBAT: 3.1 DD1.B2 | length 40.7
  Top Layer w0.15: v1(118.998,62.052) 123.723,66.778 123.723,83.312 124.961,84.55 DD1.B2
  Bottom Layer w0.15: 3.1 v1(118.998,62.052)
VCC: 2.1 3.18 4.1 | length 156.5
  Top Layer w0.15: v1(169.731,57.15) 176.95,64.369 176.95,122.186 176.378,122.758 ; 2.1 176.077,102.874 176.378,103.175 176.378,122.758 ; v1(173.05,126.086) 176.378,122.758
  Bottom Layer w0.15: 4.1 118.514,124.737 119.863,126.086 v1(173.05,126.086) ; v1(169.731,57.15) 3.18
pads on no net: 4.3 DA1.4 DD1.A3 DD1.B3 DD1.B6 DD1.B7 DD1.B8 DD1.B9 DD1.C2 DD1.C3 DD1.C4 DD1.C6 DD1.C7 DD1.C8 DD1.D2 DD1.D3 DD1.D4 DD1.D6 DD1.D7 DD1.D8 DD1.E2 DD1.E3 DD1.E4 DD1.E5 DD1.E6 DD1.E7 DD1.E8 DD1.E9 DD1.E10 DD1.F1 DD1.F2 DD1.F3 DD1.F4 DD1.F5 DD1.F6 DD1.F7 DD1.F8 DD1.F9 DD1.F10 DD1.G1 DD1.G4 DD1.G6 DD1.G7 DD1.G9 DD1.G10 DD1.H1 DD1.H4 DD1.H5 DD1.H6 DD1.H7 DD1.H9 DD1.H10 DD1.J1 DD1.J5 DD1.J6 DD1.J9 DD1.J10 DD1.K1 DD1.K5 DD1.K6 DD1.K9 DD1.K10 SB1.5 XP1.3 XP1.8 XP1.9 XP1.10 XP1.12 XP1.13 XP1.14 XP1.15 ZQ2.3 ZQ2.4
copper on no net: | length 7.5
  Top Layer w0.15: v2(160.15,98.075) 163.328,98.075 164.668,99.416
  Top Layer w0.3: v2(136.325,98.85) 138.8,98.85
  other v1: 128.588,96.744
  other v2: 143.662,108.15 121.514,119.275

## Polygon pours and split planes (outlines as drawn)
no net on GND (split plane): 177.29,54.96 112.535,54.96 112.535,126.189 112.836,126.49 177.29,126.49
no net on VCC (split plane): 177.29,54.96 112.535,54.96 112.535,126.189 112.836,126.49 177.29,126.49

## Text inside footprints (layer, text, board x,y; h text height)
DD1: Bottom Overlay "A" at 134.86,84.715 h1.27; Bottom Overlay "K" at 134.86,77.515 h1.27; Bottom Overlay "1" at 136.34,87.465 h1.27 r270; Bottom Overlay "10" at 143.54,87.465 h1.27 r270
ZQ2: Top Overlay "*" at 160.004,112.107 h1.27 r270; Mechanical 13 "*" at 159.013,111.345 h1.27 r270